# EAGLE board swith_adapter_panelized (EAGLE 6.2)
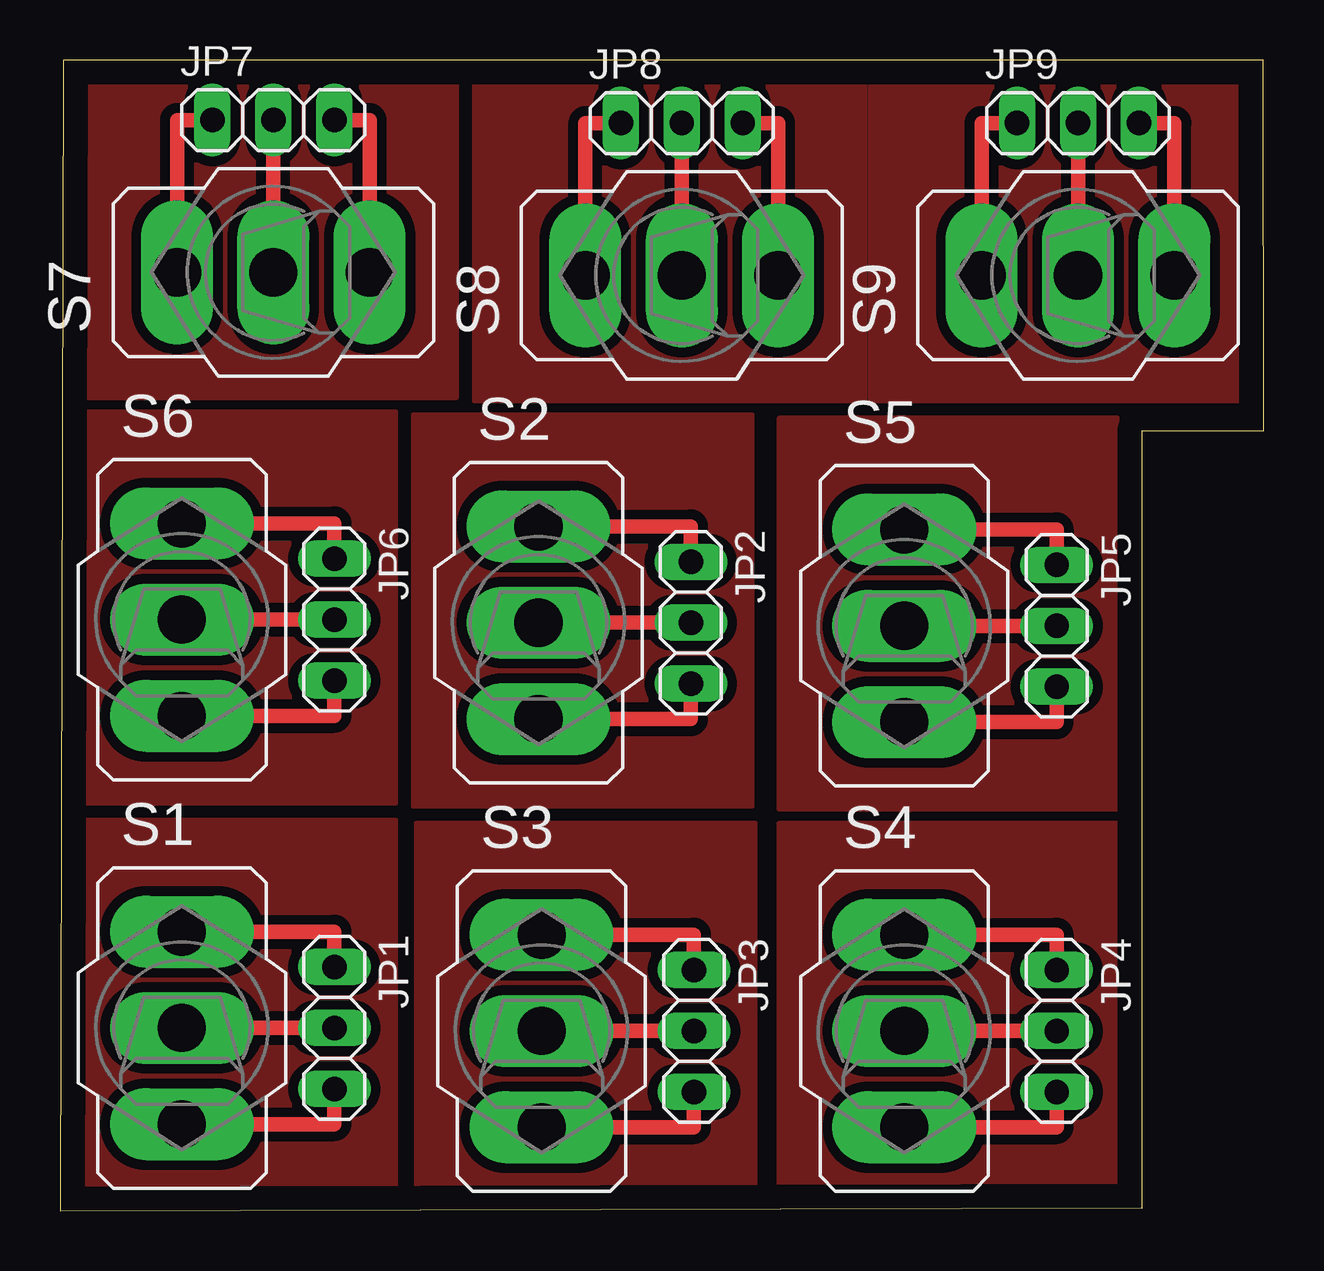
[diagram p0: board, top side]
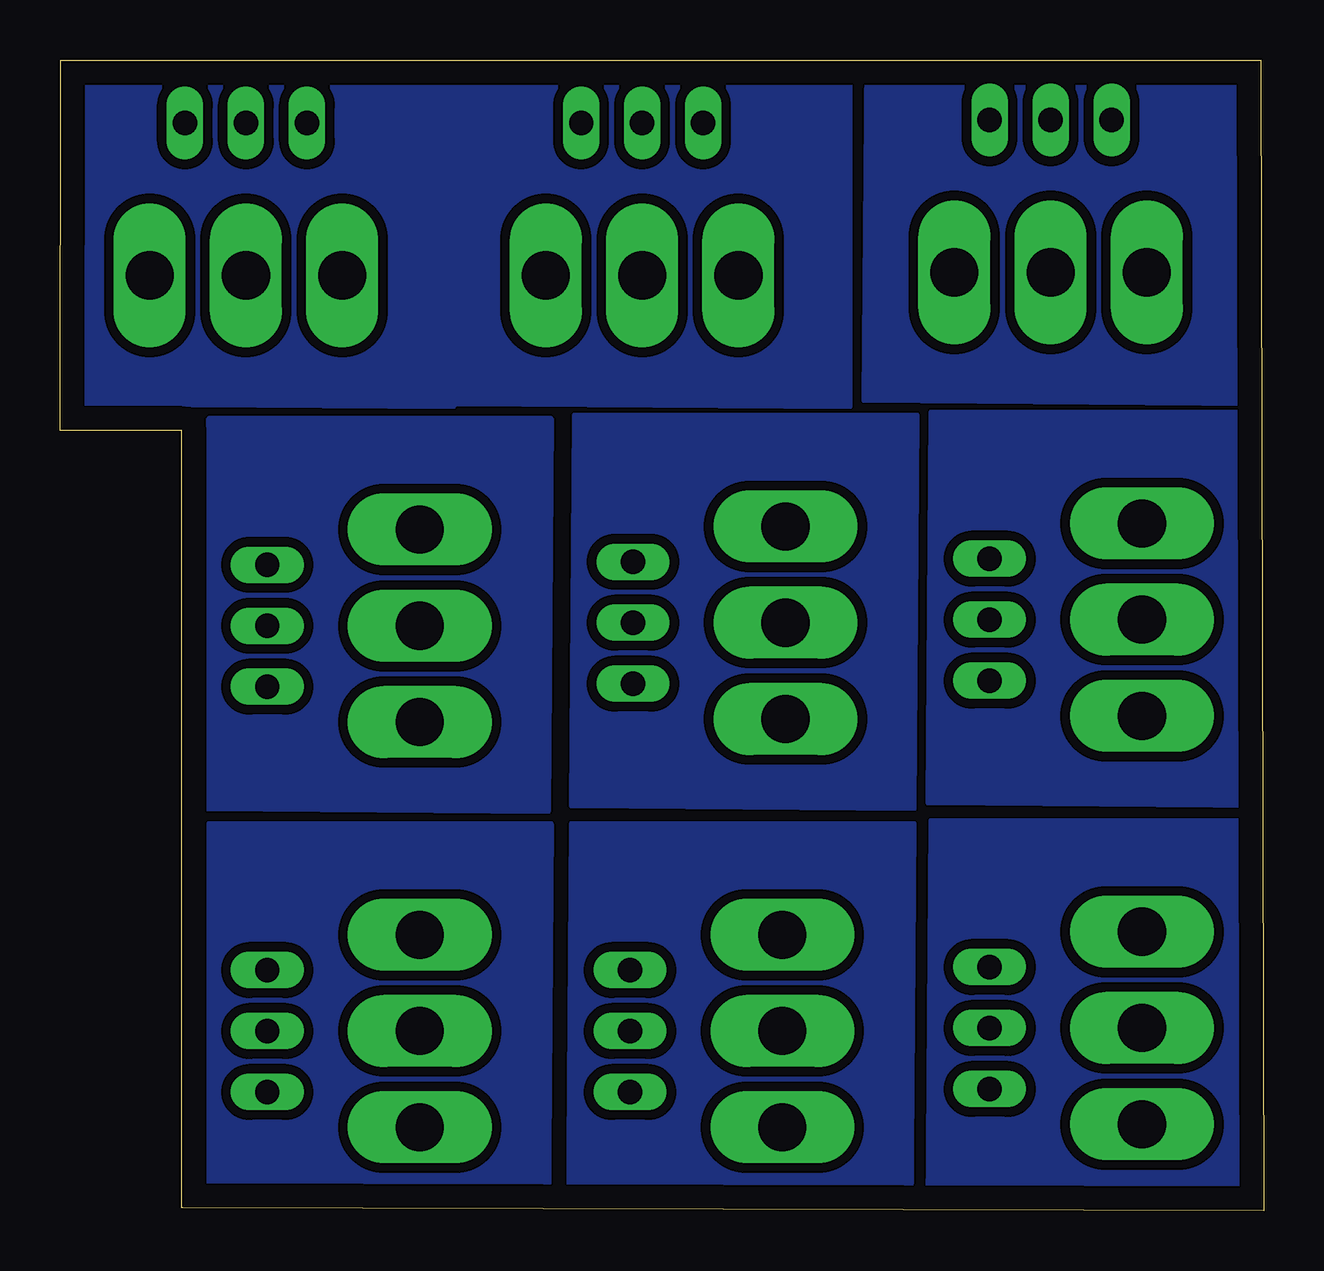
[diagram p1: board, bottom side, seen from below]

Size 50.16 x 47.97 mm. Coordinates in mm from the lower left corner, seen from the top.
Outline: 0,0 45.05,0.13 45.09,0.13 45.09,32.51 50.16,32.51 50.13,47.97 0.13,47.97 0,0
Copper layers (1*16): Top 0.035mm / dielectric 1.5mm / Bottom 0.035mm
Design rules: minimum track width 10mil, minimum drill 24mil, track to track 8mil, track to pad 8mil, pad to pad 8mil, via to via 8mil, smd to smd 8mil, copper to edge 40mil, drill to drill 8mil, minimum pad ring 10mil, minimum via ring 8mil, stop-mask expansion 4mil, vias tented up to drill 0mil, thermal gap 10mil

## Footprints (pad centres in the part's own frame; a part is rotated, then mirrored left to right if it is on the bottom)
1X03 = drill 1.016 long: 1 -2.54,0; 2 0,0; 3 2.54,0
320-916 = drill 2.007 long: 1 0,4.013; 2 0,0; 3 0,-4.013

## Placement (x,y rotation side)
JP1  [1X03]  11.43,7.62 270 top
JP2  [1X03]  26.29,24.51 270 top
JP3  [1X03]  26.42,7.49 270 top
JP4  [1X03]  41.53,7.49 270 top
JP5  [1X03]  41.53,24.38 270 top
JP6  [1X03]  11.43,24.64 270 top
JP7  [1X03]  8.89,45.47 0 top
JP8  [1X03]  25.91,45.34 0 top
JP9  [1X03]  42.42,45.34 0 top
S1  [320-916]  5.08,7.62 0 top
S2  [320-916]  19.94,24.51 0 top
S3  [320-916]  20.07,7.49 0 top
S4  [320-916]  35.18,7.49 0 top
S5  [320-916]  35.18,24.38 0 top
S6  [320-916]  5.08,24.64 0 top
S7  [320-916]  8.89,39.12 90 top
S8  [320-916]  25.91,38.99 90 top
S9  [320-916]  42.42,38.99 90 top

## Library data of the parts
JP1-JP9 = pinhead
S1-S9 = switch

## Nets
N$1: JP1.2 S1.2
N$2: JP1.1 S1.1
N$3: JP1.3 S1.3
N$5: JP2.2 S2.2
N$6: JP2.1 S2.1
N$7: JP2.3 S2.3
N$9: JP3.2 S3.2
N$10: JP3.1 S3.1
N$11: JP3.3 S3.3
N$13: JP4.2 S4.2
N$14: JP4.1 S4.1
N$15: JP4.3 S4.3
N$17: JP5.2 S5.2
N$18: JP5.1 S5.1
N$19: JP5.3 S5.3
N$21: JP6.2 S6.2
N$22: JP6.1 S6.1
N$23: JP6.3 S6.3
N$25: JP7.2 S7.2
N$26: JP7.1 S7.1
N$27: JP7.3 S7.3
N$29: JP8.2 S8.2
N$30: JP8.1 S8.1
N$31: JP8.3 S8.3
N$33: JP9.2 S9.2
N$34: JP9.1 S9.1
N$35: JP9.3 S9.3

## Tracks (layer width: path | path; a pad name or v marks a point on that pad's centre or on a via)
N$1
  Top 0.61: S1.2 JP1.2
N$2
  Top 0.61: S1.1 11.43,11.63 JP1.1
N$3
  Top 0.61: S1.3 11.43,3.61 JP1.3
N$4
  pour Top (isolate 0.406): -0.13,16.13 -0.13,0 13.97,0 13.97,16.26 -0.13,16.26
  pour Bottom (isolate 0.406): -0.38,16.26 -0.25,-0.13 13.97,0 13.84,16.26
N$5
  Top 0.61: S2.2 JP2.2
N$6
  Top 0.61: S2.1 26.29,28.52 JP2.1
N$7
  Top 0.61: S2.3 26.29,20.5 JP2.3
N$8
  pour Top (isolate 0.406): 14.73,33.15 14.73,16.89 28.83,16.89 28.83,33.15
  pour Bottom (isolate 0.406): 14.48,33.15 14.61,16.76 28.83,16.89 28.7,33.15
N$9
  Top 0.61: S3.2 JP3.2
N$10
  Top 0.61: S3.1 26.42,11.51 JP3.1
N$11
  Top 0.61: S3.3 26.42,3.48 JP3.3
N$12
  pour Top (isolate 0.406): 14.86,16 14.86,-0.13 28.96,-0.13 28.96,16.13 14.86,16.13
  pour Bottom (isolate 0.406): 14.61,16.13 14.73,-0.25 28.96,-0.13 28.83,16.13
N$13
  Top 0.61: S4.2 JP4.2
N$14
  Top 0.61: S4.1 41.53,11.51 JP4.1
N$15
  Top 0.61: S4.3 41.53,3.48 JP4.3
N$16
  pour Top (isolate 0.406): 29.97,16 29.97,-0.13 44.07,-0.13 44.07,16.13 29.97,16.13
  pour Bottom (isolate 0.406): 29.72,16.13 29.84,-0.25 44.07,-0.13 43.94,16.13
N$17
  Top 0.61: S5.2 JP5.2
N$18
  Top 0.61: S5.1 41.53,28.4 JP5.1
N$19
  Top 0.61: S5.3 41.53,20.37 JP5.3
N$20
  pour Top (isolate 0.406): 29.97,32.89 29.97,16.76 44.07,16.76 44.07,33.02 29.97,33.02
  pour Bottom (isolate 0.406): 29.72,33.02 29.84,16.64 44.07,16.76 43.94,33.02
N$21
  Top 0.61: S6.2 JP6.2
N$22
  Top 0.61: S6.1 11.43,28.65 JP6.1
N$23
  Top 0.61: S6.3 11.43,20.62 JP6.3
N$24
  pour Top (isolate 0.406): -0.13,33.27 -0.13,17.02 13.97,17.02 13.97,33.27
  pour Bottom (isolate 0.406): -0.38,33.27 -0.25,16.89 13.97,17.02 13.84,33.27
N$25
  Top 0.61: S7.2 JP7.2
N$26
  Top 0.61: S7.1 4.88,45.47 JP7.1
N$27
  Top 0.61: S7.3 12.9,45.47 JP7.3
N$28
  pour Top (isolate 0.406): 0.25,33.91 16.51,33.91 16.51,48.01 0.25,48.01
  pour Bottom (isolate 0.406): 0.25,33.66 16.64,33.78 16.51,48.01 0.25,47.88
N$29
  Top 0.61: S8.2 JP8.2
N$30
  Top 0.61: S8.1 21.89,45.34 JP8.1
N$31
  Top 0.61: S8.3 29.92,45.34 JP8.3
N$32
  pour Top (isolate 0.406): 17.27,33.78 33.53,33.78 33.53,47.88 17.27,47.88
  pour Bottom (isolate 0.406): 17.27,33.53 33.66,33.66 33.53,47.88 17.27,47.75
N$33
  Top 0.61: S9.2 JP9.2
N$34
  Top 0.61: S9.1 38.41,45.34 JP9.1
N$35
  Top 0.61: S9.3 46.43,45.34 JP9.3
N$36
  pour Top (isolate 0.406): 33.78,33.78 50.04,33.78 50.04,47.88 33.78,47.88
  pour Bottom (isolate 0.406): 33.78,33.53 50.16,33.66 50.04,47.88 33.78,47.75